# Altium PCB dv_spectrum_main.PcbDoc
Units mm, origin at the board's own origin, x right, y up, seen from the top; angles counter-clockwise.
Board outline 99.31 x 60.23 mm, 2 copper layers (Top Layer, Bottom Layer); 57 components, 70 nets, 286 pads, 112 vias.
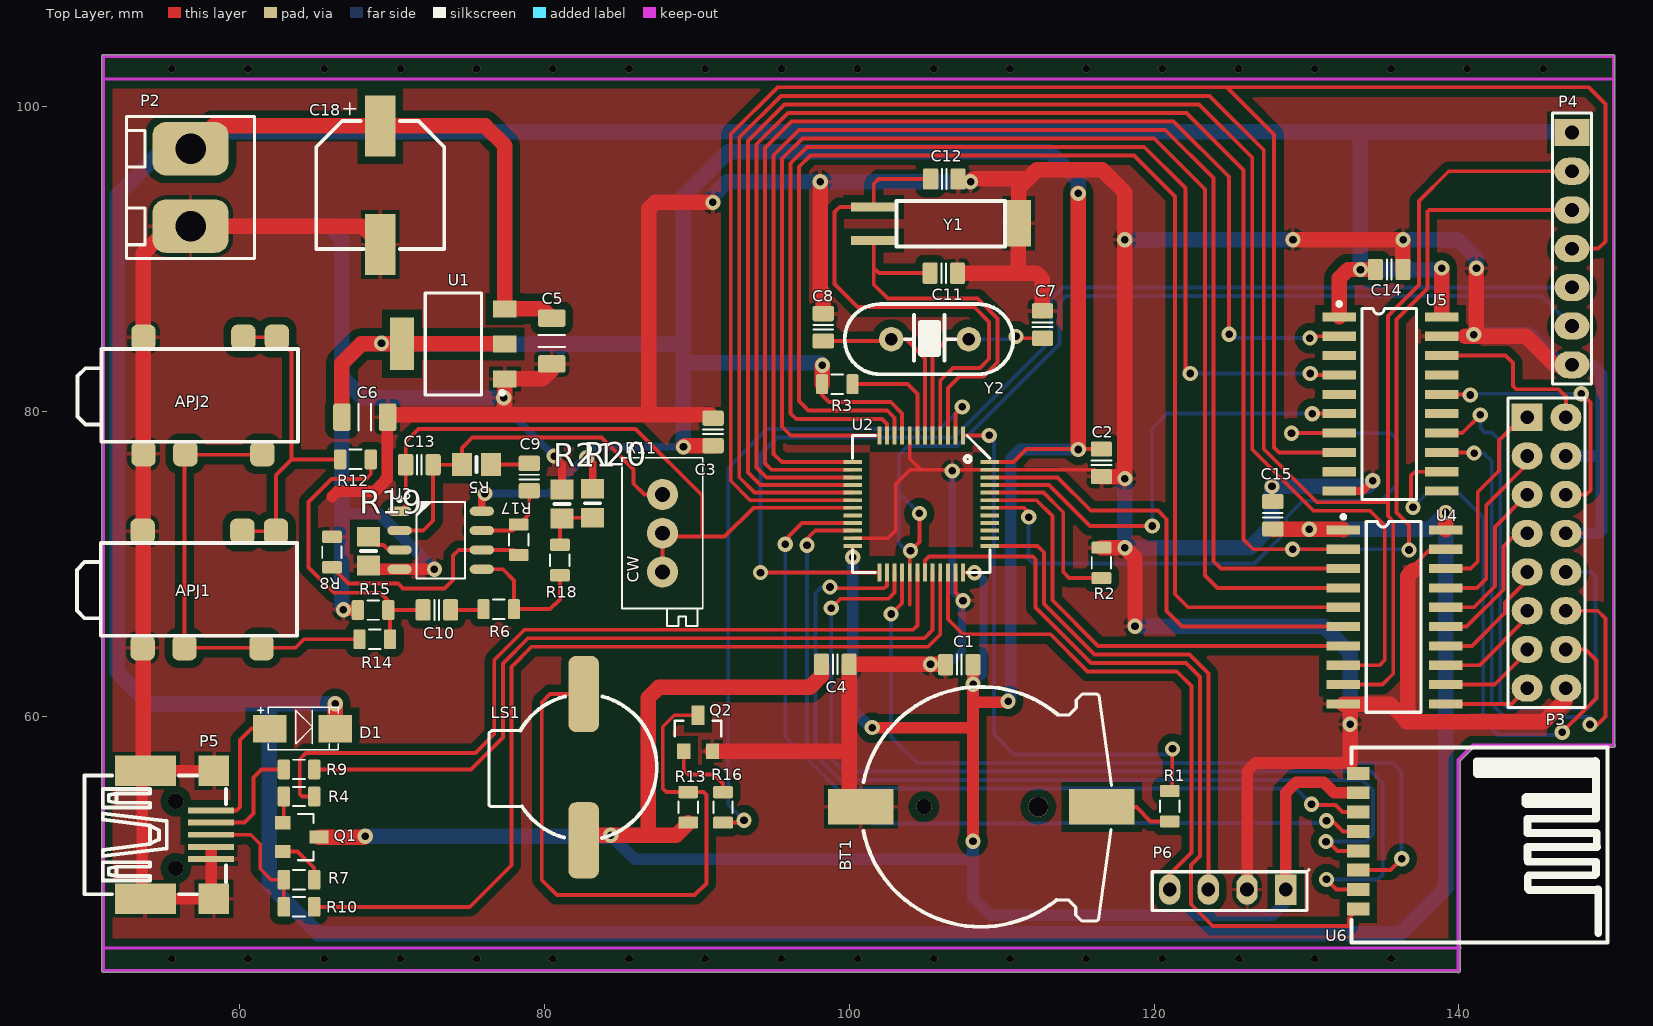
[diagram p0: Top Layer view]
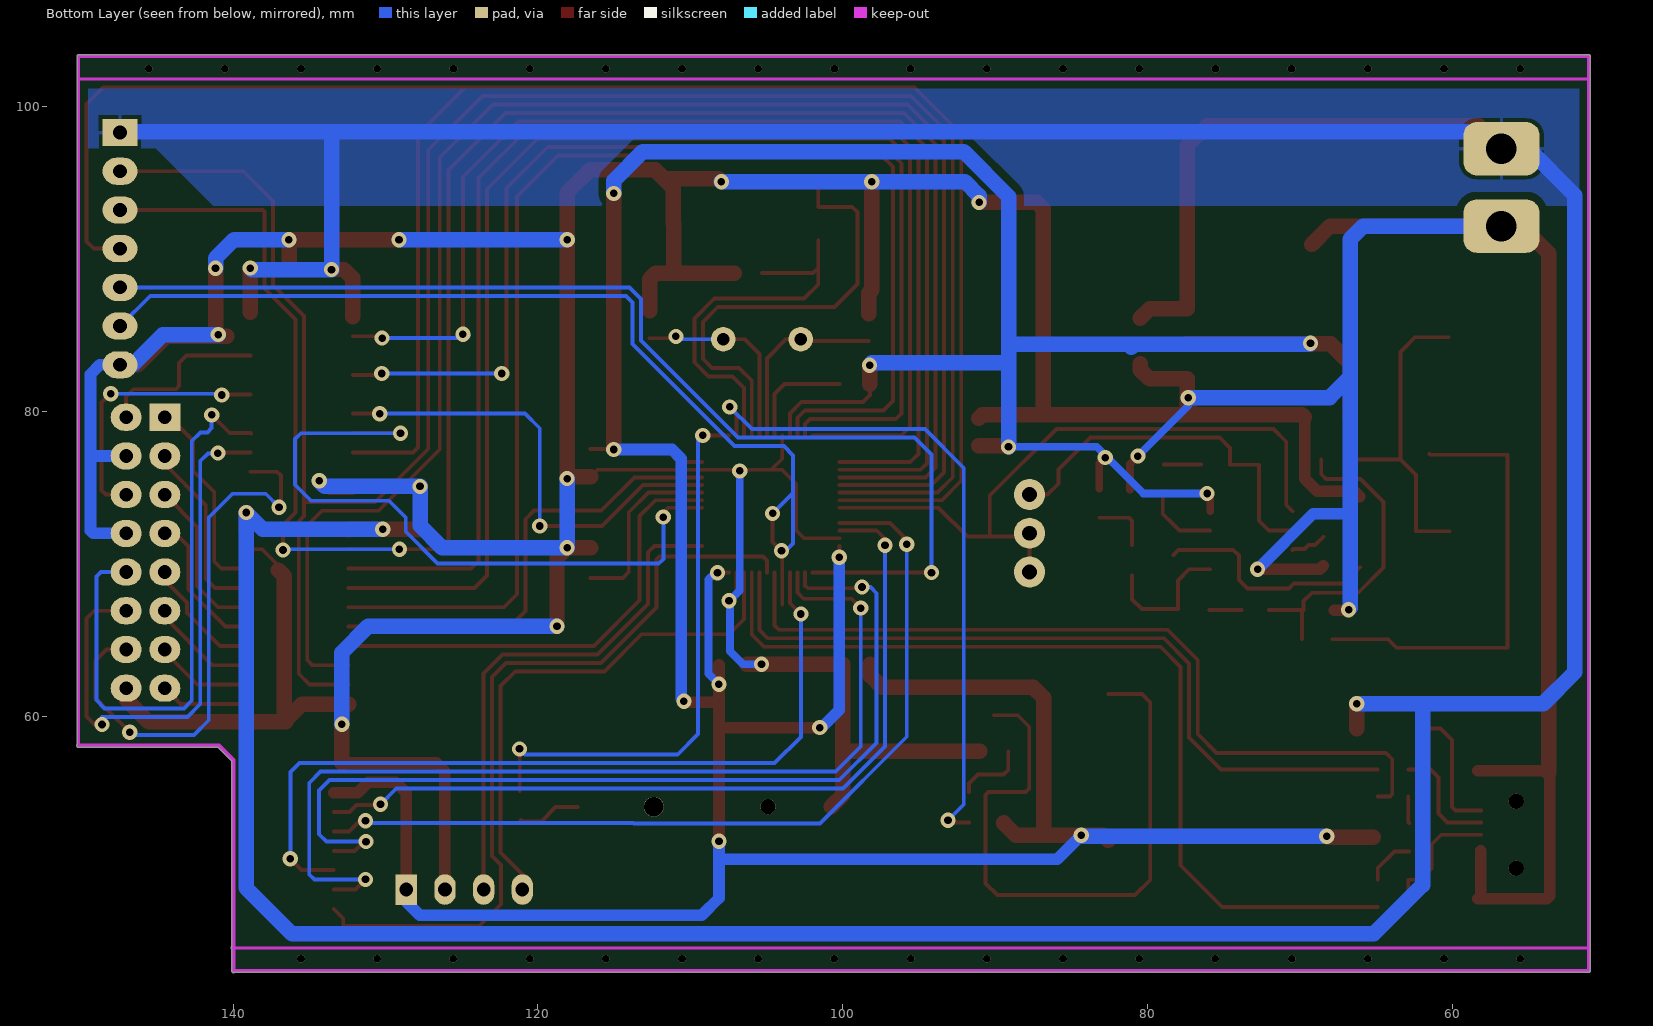
[diagram p1: Bottom Layer view, seen from below]

## Layer stack, top to bottom
Top Layer: signal copper 0.0356
Dielectric: dielectric 0.32, FR-4, Dk 4.8
Bottom Layer: signal copper 0.0356

## Board outline
50.935,43.307 ccw(c51.035,43.307) 51.035,43.207 139.879,43.207 ccw(c139.957,43.307) 140.084,43.307 140.084,44.729 ccw(c140.022,44.807) 140.122,44.807 ccw(c140.022,44.807) 140.084,44.885 140.084,57.075 140.968,57.959 150.122,57.959 ccw(c150.122,58.086) 150.249,58.086 ccw(c150.122,58.086) 150.235,58.144 150.235,103.307 ccw(c150.135,103.307) 150.135,103.407 51.035,103.407 ccw(c51.035,103.307) 50.935,103.307

## Design rules (kind name [scope] priority, off if disabled: settings)
Clearance Clearance_1 [IsRegion] p1: gap=0.508
Clearance [All] p2: gap=0.305
PolygonConnect [All] p1: connectstyle=Relief reliefconductorwidth=0.254 reliefentries=4 polygonreliefangle="90 Angle" airgapwidth=0.254
RoomDefinition dv_spectrum_main [InComponentClass('dv_spectrum_main')] p1: confinementstyle=ConfineIn formatcopy=TRUE lockcomponents=FALSE outline 48.92,44.772 150.128,44.772 150.128,101.096 48.92,101.096
RoutingVias [All] p1: holewidth=0.5 width=1 viastyle="Through Hole" minholewidth=0.5 minwidth=1 maxholewidth=0.5 maxwidth=1
SolderMaskExpansion [All] p1: expansion=0.102
Width [All] p1: maxlimit=1.016 minlimit=0.254 preferedwidth=0.254
28 further rules are at their usual default settings.

## Components (designator, comment, footprint, x,y, rotation, side; value= is the part's Value field where it differs from the comment)
APJ1 "APJ3-095S64" APJ3-095S64 53.619,64.527 r0 top
APJ2 "APJ3-095S64" APJ3-095S64 53.675,77.253 r0 top
BT1 "Battery3.3V" CR1220 100.752,54.064 r90 top
C1 "approved sub OK" CAPC2012X135N 107.206,63.394 r180 top
C2 "approved sub OK" CAPC2012X135N 116.536,76.634 r270 top
C3 "approved sub OK" CAPC2012X135N 91.053,78.662 r90 top
C4 "approved sub OK" CAPC2012X135N 99.074,63.413 r0 top
C5 "Ceramic Cap 1206 10uF 25V 10% X5R" CAPC3216X180N 80.463,84.631 r90 top
C6 "Ceramic Cap 1206 10uF 25V 10% X5R" CAPC3216X180N 68.199,79.629 r180 top
C7 "22p" CAPC2012X135N 112.664,85.706 r270 top
C8 "22p" CAPC2012X135N 98.281,85.522 r270 top
C9 "approved sub OK" CAPC2012X135N 78.988,75.701 r90 top
C10 "approved sub OK" CAPC2012X135N 72.926,66.982 r0 top
C11 "15p-50V-5%" CAPC2012X135N 106.192,89.08 r180 top
C12 "15p-50V-5%" CAPC2012X135N 106.229,95.257 r180 top
C13 "approved sub OK" CAPC2012X135N 71.783,76.507 r180 top
C14 "0.1UF 50V" CAPC2012X135N 135.418,89.32 r180 top
C15 "0.1UF 50V" CAPC2012X135N 127.783,73.192 r270 top
C18 "330u, 16v" "CAPACITOR SIZE_F(D8.3)" 69.215,98.741 r270 top
D1 "SSB44" "DO-214AC (SMA)" 62.865,59.69 r0 top
LS1 "Speaker" BUZZER-SMD 82.559,51.864 r90 top
P2 "PWR" "DOMINO SMALL" 56.762,97.247 r270 top
P3 "Led Matrix" HDR2X8 144.472,79.625 r270 top
P4 "LED Spectrum" HDR1X7 147.413,98.306 r270 top
P5 "10033526-N3222LF" "USB MINI B RECEPTACLE-M" 58.6,53.827 r90 top
P6 "Header 4" HEADER_MALE_STRAIGHT_1x4 128.632,48.532 r180 top
Q1 "C1815" SC-43-BCE 64.008,52.07 r270 top
Q2 "C1815" SC-43-BCE 90.068,58.886 r0 top
R1 "10k-5%" RESC2012X70N 121.017,54.101 r270 top
R2 "RES 3.30K OHM 1/8W" RESC2012X70N 116.536,70.069 r90 top
R3 "RES 3.30K OHM 1/8W" RESC2012X70N 99.204,81.797 r0 top
R4 "10k-5%" RESC2012X70N 63.881,54.737 r180 top
R5 "Thick Film" R0805 75.523,76.519 r0 top
R6 "Thick Film" RESC2012X70N 76.99,67.032 r0 top
R7 "1k5-5%" RESC2012X70N 63.881,49.276 r0 top
R8 "Thick Film" RESC2012X70N 66.041,70.78 r90 top
R9 "22R-5%" RESC2012X70N 63.881,56.515 r180 top
R10 "22R-5%" RESC2012X70N 63.881,47.498 r180 top
R11 "25 turns" TRIMPOT_THT_PV36X 87.732,72.014 r90 top
R12 "Thick Film" RESC2012X70N 67.588,76.861 r0 top
R13 "RES 3.30K OHM 1/8W" RESC2012X70N 89.417,54.023 r270 top
R14 "Thick Film" RESC2012X70N 68.852,65.054 r0 top
R15 "Thick Film" RESC2012X70N 68.742,66.971 r0 top
R16 "RES 3.30K OHM 1/8W" RESC2012X70N 91.703,54.023 r90 top
R17 "Thick Film" RESC2012X70N 78.296,71.594 r270 top
R18 "Thick Film" RESC2012X70N 81,70.252 r90 top
R19 "Thick Film" R0805 68.453,70.836 r270 top
R20 "Thick Film" R0805 83.147,73.977 r90 top
R21 "Thick Film" R0805 81.142,73.924 r90 top
U1 "AP1117IE33G-13" SOT223 74.015,84.436 r90 top
U2 "STM32F103C8T6" TQFP-48-P0.5 104.711,73.932 r270 top
U3 "AD8512" SOIC127P600X175-8AN 73.18,71.554 r0 top
U4 "74HC245/SO" SO20-150mil 132.415,72.236 r270 top
U5 "74HC245/SO" SO20-150mil 132.135,86.209 r270 top
U6 "RMF70" RFM70S 133.697,56.253 r270 top
Y1 "32768Hz" "cylindrical crystal" 106.358,92.325 r0 top
Y2 "8MHz" HC49/US 105.288,84.747 r0 top

## Footprints (in the part's own frame and the unit in brackets; to place one, negate y for a bottom-side part, rotate by r counter-clockwise, add the part's x,y. Pads: shape width x height; smd on the part's side, far side on the other; paste and mask are expansions set on the pad)
APJ3-095S64 [mm] "3.5 Audio Jack"
  rrect50% 1.6x1.65 smd: 1(0,-0.03) 2(6.55,7.62) 3(2.75,-0.03) 4(0,7.62) 10(8.75,7.62) 11(7.8,-0.03)
  silkscreen extent -4.32,0.76 10.14,6.86
BUZZER-SMD [mm]
  rrect50% 5x2 smd: 1(0,0) 2(9.6,0)
  silkscreen extent 0.15,-4.8 9.44,6.2, body extent -1.4,-4.52 10.9,5.63, height 4
"CAPACITOR SIZE_F(D8.3)" [mm]
  rect 4x2 smd: 1(0,0) 2(7.781,0)
  silkscreen extent -1.52,-4.2 8.08,4.2, body extent -1.02,-4.15 8.88,4.15, height 10.21
CAPC2012X135N [mm] "Chip Capacitor, Body 2.0x1.2mm, EIA 0805, IPC Medium Density"
  round 0.254 on Mech15: 0(0,0)
  rrect25% 1x1.4 smd: 1(-0.9,0) 2(0.9,0)
  Top Layer pour cut-out: -0.675,0.7 -0.475,0.9 0.475,0.9 0.675,0.7 0.675,-0.7 0.475,-0.9 -0.475,-0.9 -0.675,-0.7
  silkscreen extent -0.15,-0.65 0.15,0.65, body extent -1.1,-0.72 1.1,0.73, height 1.34
CAPC3216X180N [mm] "Chip Capacitor, Body 3.2x1.6mm, 1.8mm H, EIA 1206, IPC Medium Density"
  round 0.508 on Mech15: 0(0,0)
  rrect25% 1.15x1.8 smd: 1(-1.5,0) 2(1.5,0)
  silkscreen extent -0.4,-0.88 0.4,0.88, body extent -1.7,-0.9 1.7,0.9, height 1.8
CR1220 [mm]
  rect 2.3x4.3 smd: 1(0,-15.79) 2(0,0)
  round 1 hole 1: HOLE(0,-4.14)
  round 1.3 hole 1.3: HOLE(0,-11.64)
  silkscreen extent -7.88,-16.43 7.87,-0.16, body extent -7.3,-17.15 7.7,1.35, height 4.94
"cylindrical crystal" [mil]
  rect 118.1x23.6 smd: 1(-187.37,-43.27) 2(-187.37,43.27)
  rect 62x120 smd: 3(187.37,1.13)
  silkscreen extent -128,-59 151,59, body extent -191,-55 183,55, height 87
"DO-214AC (SMA)" [mm]
  rect 2.2x1.8 smd: 1(-0.899,-0.5) 2(3.397,-0.5)
  silkscreen extent -1.7,-1.9 3.6,0.9, body extent -1.3,-1.8 3.9,0.8, height 2.3
"DOMINO SMALL" [mm]
  rrect50% 3.5x5 hole 2: 1(5.08,0) 2(0,0)
  silkscreen extent -2.1,-4.2 7.2,4.2, body extent -2.46,-3.53 7.54,3.97, height 3.49
HC49/US [mm] "HC-49/U Through-Hole Low profile XTAL"
  round 1.6 hole 0.8: 1(-2.54,0) 2(2.54,0)
  silkscreen extent -5.59,-2.3 5.46,2.3, body extent -5.64,-2.3 5.53,2.37, height 3.63
HDR1X7 [mil] "Connector; Header; 7 Position"
  rect 70x90 hole 35.43: 1(0,0)
  oval 70x90 hole 35.43: 2(100,0) 3(200,0) 4(300,0) 5(400,0) 6(500,0) 7(600,0)
  silkscreen extent -50,-50 650,50
HDR2X8 [mil] "Connector; Header; 8x2 Position"
  rect 70x80 hole 35.43: 1(0,0)
  oval 70x80 hole 35.43: 2(0,100) 3(100,0) 4(100,100) 5(200,0) 6(200,100) 7(300,0) 8(300,100) 9(400,0) 10(400,100) 11(500,0) 12(500,100) 13(600,0) 14(600,100) 15(700,0) 16(700,100)
  silkscreen extent -50,-50 750,150
HEADER_MALE_STRAIGHT_1x4 [mm]
  rect 1.4x2 hole 0.9: 1(0,-0.1)
  oval 1.4x2 hole 0.9: 2(2.54,-0.1) 3(5.08,-0.1) 4(7.62,-0.1)
  silkscreen extent -1.52,-1.4 8.76,1.27, body extent -1.26,-1.35 8.8,1.15, height 8.2
R0805 [mm] "Chip Resistor; Body 2.0 x 1.2 mm (LxW typ)"
  rect 1.3x1.5 smd: 1(0.95,0) 2(-0.95,0)
  silkscreen extent 0,-0.5 0,0.5, body extent -1,-0.65 1,0.6, height 0.78
RESC2012X70N [mm] "Chip Resistor, Body 2.0x1.2mm, EIA 0805, IPC Medium Density"
  round 0.254 on Mech15: 0(0,0)
  rrect25% 0.8x1.3 smd: 1(-1,0) 2(1,0)
  Top Layer pour cut-out: -0.725,0.65 -0.525,0.85 0.525,0.85 0.725,0.65 0.725,-0.65 0.525,-0.85 -0.525,-0.85 -0.725,-0.65
  silkscreen extent -0.38,-0.64 0.38,0.64, body extent -1.1,-0.67 1.1,0.68, height 0.69
RFM70S [mm]
  rect 0.85x1.5 smd: 1(0,-0.305) 2(1.27,-0.305) 3(2.54,-0.305) 4(3.81,-0.305) 5(5.08,-0.305) 6(6.35,-0.305) 7(7.62,-0.305) 8(8.89,-0.305)
  Top Layer pour cut-out: -0.559,-0.787 -0.559,0.762 9.474,0.762 9.474,-0.813
  silkscreen extent -1.7,-0.76 11.1,16.05
SC-43-BCE [mil]
  rect 34x40 smd: B(-37.02,-46.5) E(37.02,-46.5)
  rect 34x50 smd: C(0.02,46.5)
  silkscreen extent -60,-8 60,33, body extent -57,-52 57,58, height 41
SO20-150mil [mm] "Small Outline; 16 Leads; Body Width 3.9 mm; Pitch 1.27 mm"
  rect 0.6x2.2 smd: 1(0,0) 2(1.27,0) 3(2.54,0) 4(3.81,0) 5(5.08,0) 6(6.35,0) 7(7.62,0) 8(8.89,0) 9(10.16,0) 10(11.43,0) 11(11.43,6.724) 12(10.16,6.724) 13(8.89,6.724) 14(7.62,6.724) 15(6.35,6.724) 16(5.08,6.724) 17(3.81,6.724) 18(2.54,6.724) 19(1.27,6.724) 20(0,6.724)
  silkscreen extent -0.97,-0.12 11.97,5.08, body extent -0.75,-0.5 12.15,7.3, height 2
SOIC127P600X175-8AN [mm] "SOIC, 8-Leads, Body 4.9x3.9mm, Pitch 1.27mm, IPC Medium Density"
  round 1 on Mech15: 0(0,0)
  oval 1.6x0.6 smd: 1(-2.7,1.905) 2(-2.7,0.635) 3(-2.7,-0.635) 4(-2.7,-1.905) 5(2.7,-1.905) 6(2.7,-0.635) 7(2.7,0.635) 8(2.7,1.905)
  silkscreen extent -2.82,-2.5 1.6,2.82, body extent -3,-2.45 3,2.45, height 1.75
SOT223 [mm] "SOT-223/SC-73; 4 Leads; Body 6.7 x 7.3 mm, inc. leads (LxW max)"
  rect 1.1x1.55 smd: 1(-2.3,-3.375) 2(0,-3.375) 3(2.3,-3.375)
  rect 3.45x1.55 smd: 4(0,3.375)
  silkscreen extent -3.35,-3.33 3.35,1.85, body extent -3.25,-3.43 3.25,3.57, height 1.65
TQFP-48-P0.5 [mm] "Thin QFP, 48-Leads, Body 7x7mm, Pitch 0.5mm, IPC Medium Density"
  rect 1.2x0.254 smd mask+0.152: 1(-4.5,2.75) 2(-4.5,2.25) 3(-4.5,1.75) 4(-4.5,1.25) 5(-4.5,0.75) 6(-4.5,0.25) 7(-4.5,-0.25) 8(-4.5,-0.75) 9(-4.5,-1.25) 10(-4.5,-1.75) 11(-4.5,-2.25) 12(-4.5,-2.75) 25(4.5,-2.75) 26(4.5,-2.25) 27(4.5,-1.75) 28(4.5,-1.25) 29(4.5,-0.75) 30(4.5,-0.25) 31(4.5,0.25) 32(4.5,0.75) 33(4.5,1.25) 34(4.5,1.75) 35(4.5,2.25) 36(4.5,2.75)
  rect 0.254x1.2 smd mask+0.152: 13(-2.75,-4.5) 14(-2.25,-4.5) 15(-1.75,-4.5) 16(-1.25,-4.5) 17(-0.75,-4.5) 18(-0.25,-4.5) 19(0.25,-4.5) 20(0.75,-4.5) 21(1.25,-4.5) 22(1.75,-4.5) 23(2.25,-4.5) 24(2.75,-4.5) 37(2.75,4.5) 38(2.25,4.5) 39(1.75,4.5) 40(1.25,4.5) 41(0.75,4.5) 42(0.25,4.5) 43(-0.25,4.5) 44(-0.75,4.5) 45(-1.25,4.5) 46(-1.75,4.5) 47(-2.25,4.5) 48(-2.75,4.5)
  silkscreen extent -4.5,-4.5 4.5,4.5, body extent -4.5,-4.5 4.5,4.5, height 1.5
TRIMPOT_THT_PV36X [mil] "TRIMMER, MURATA, PV36X"
  round 80 hole 38: CCW(100,0) CW(-100,0) W(0,0)
  silkscreen extent -240,-104 195,104, body extent -240,-98 189,98, height 394
"USB MINI B RECEPTACLE-M" [mm]
  rect 0.381x3 smd: 1(0,0.5) 2(-0.8,0.5) 3(-1.6,0.5) 4(-2.4,0.5) 5(-3.2,0.5)
  rect 2x2 smd: 6(2.601,0.3) 7(-5.801,0.3)
  rect 2x4 smd: 8(2.601,4.801) 9(-5.801,4.801)
  round 1 / inner round 1.524 / far side round 1 hole 1: 10(0.6,2.8) 11(-3.8,2.8)
  silkscreen extent -5.5,-0.5 2.3,8.8, body extent -6.9,-0.4 3.8,8.8, height 3.95

## Part data
BT1: "Multicell Battery"
C1 C2 C3 C4: library part CAPC_100n_0805_X7R_100V_10%, "Capacitor SMD Cer 100nF 10% 100V X7R 0805"
C5 C6: library part GRM31CR61E106KA12, "Cap 1206 10uF 25V 10% X5R"
C7 C8: library part "Cap Semi", "Capacitor (Semiconductor SIM Model)"
C9: library part CAPC_100n_0805_X7R_50V_10%, "Capacitor SMD Cer 100nF 10% 50V X7R 0805"
C10: library part CAPC_1u_0805_X7R_16V_10%, "Capacitor SMD Cer 1uF 10% 16V X7R 0805"
C11 C12: library part Cap, "CAP CER 15PF 50V 5% NPO 0603"
C13: library part CAPC_1n8_50V_0805, "Capacitor SMD Cer 1.8nF 10% 50V X7R 0805"
C14 C15: library part CC0805ZRY5V9BB104, "CAP CER 0.1UF 50V Y5V 0805"
C18: library part "Cap Pol3", "Polarized Capacitor (Surface Mount)"
D1: "Schottky Diode 40V 4A SMB"
LS1: "Loudspeaker"
P2: library part "Header 2", "Header, 2-Pin"
P3: library part "Header 8X2", "Header, 8-Pin, Dual row"
P4: library part "Header 7", "Header, 7-Pin"
P5: library part "Header 9", "CONN RCPT USB MINI B R/A SMD"
P6: "Header, 4-Pin"
Q1 Q2: library part "NPN Transistor", "TRANSISTOR NPN 50V 150MA"
R1 R4: library part Res1, "RES 10K OHM 1/10W 5% 0603 SMD"
R2 R3 R13 R16: library part RC0805FR-073K3L, "RES 3.30K OHM 1/8W 1% 0805 SMD"
R5 R12 R14: library part RES_4K7_0805_5%, "Resistor SMD chip 4.7k Ohm 0.125W 5% 0805"
R6 R8 R15 R17 R18 R19 R20 R21: library part RES_10K_0805_5%, "Resistor SMD chip 10k Ohm 0.125W 5% 0805"
R7: library part Res1, "RES 1.5K OHM 1/10W 5% 0603 SMD"
R9 R10: library part Res1, "RES 22 OHM 1/10W 5% 0603 SMD"
R11: library part RES_TRIMMER_10K_25T_THT, "Trimmer THD 10K 500mW 25-turn"
U1: "1A Low Dropout Positive Regulator 3.3V"
U2: "48pins, 64 KBytes Flash, 20 KBytes SRAM, 1x I2C, 1x SPI (18 Mbit/s)"
U3: library part IC_Op-Amp_AD8512, "IC SMD Low Cost Op Amp SOIC-8"
U4 U5: library part 74HC245/SO_1
Y1: library part XTAL, "CRYSTAL 32.000 KHZ 12.5PF CYL"
Y2: library part XTAL, "Crystal Oscillator"

## Via types
v1: diameter 1, hole 0.5, Top Layer to Bottom Layer, 76 vias
v2: diameter 0.508, hole 0.508, Top Layer to Bottom Layer, tented both sides, 19 vias
v3: diameter 0.5, hole 0.5, Top Layer to Bottom Layer, tented both sides, 17 vias

## Nets (pads, with @x,y where several pads share a name; then routed paths per layer and width w, separated by ;. In a path a pad name is that pad's centre, name@x,y a point inside that pad or via, vN(x,y) a via of type N, cw(c..) or ccw(c..) an arc to the next point about the centre after c; other vN are vias at no path point)
3V3: C1.1 C2.1 C3.1 C4.1 C6.2 LS1.1 P6.1 Q1.C R3.1 R13.2 R20.1 U1.2 U1.4 U2.9 U2.24 U2.36 U2.48 U3.8 U6.2 | length 314.7
  Top Layer w0.254: R3.1 98.204,81.074 98.649,80.628 102.712,80.628 103.461,79.878 U2.9 ; v1(100.211,70.435) U2.24 ; U2.36 v1@108.362,69.432 ; U2.48 110.759,76.682 111.611,77.534 115.008,77.534 C2.1
  Top Layer w0.5: U3.8 75.88,74.424 v1(76.079,74.623) ; v1(82.763,76.979) 83.147,76.594 R20.1
  Top Layer w0.762: v1(101.498,59.259) 108.014,59.259 ; v1(108.106,51.806) 108.106,60.914 ; C1.1 108.106,60.914 ; v1(110.413,60.987) 110.339,60.914 108.106,60.914 ; P6.1 128.632,54.981 129.321,55.669 131.13,55.669 131.816,54.983 U6.2
  Top Layer w1.016: Q1.C v1@68.134,52.07 ; C6.2 66.699,83.168 67.967,84.436 U1.2 ; LS1.1 82.896,52.201 v1(84.331,52.201) 86.812,52.201 ; v1(89.11,77.677) 89.195,77.762 C3.1 ; R13.2 89.417,52.968 88.65,52.201 86.812,52.201 ; C4.1 98.174,62.676 97.404,61.906 87.492,61.906 86.812,61.226 86.812,52.201 ; R3.1 98.204,83.012 v1(98.226,83.035) ; v1(115.008,77.511) 115.008,77.534 v1(115.008,94.311)
  Bottom Layer w0.5: v1(76.079,74.623) 80.273,74.623 83.327,77.677 v1(89.11,77.677)
  Bottom Layer w0.508: v1(108.115,62.108) 108.795,62.788 108.795,68.983 108.354,69.424 v1(108.207,69.424)
  Bottom Layer w0.762: v1@84.257,52.128 84.404,52.128 85.911,50.62 108.106,50.62 ; v1(100.211,70.435) 100.211,60.418 v1@101.333,59.296 ; v1(108.106,51.806) 108.106,50.62 ; v1@110.575,61.149 110.575,76.901 111.185,77.511 v1(115.008,77.511) ; P6.1 128.632,47.831 127.746,46.945 109.241,46.945 108.106,48.079 108.106,50.62
  Bottom Layer w1.016: v1(68.229,52.128) v1@84.257,52.128 ; v1(69.295,84.478) 69.35,84.422 80.857,84.422 ; 81.059,84.22 80.857,84.422 ; v1(89.11,77.677) 89.11,83.191 ; v1@98.07,83.191 89.11,83.191 ; v1(115.008,94.311) 115.008,95.157 113.115,97.05 92.051,97.05 89.11,94.109 89.11,84.735 ; 80.857,84.422 88.797,84.422 89.11,84.735 ; 89.11,83.191 89.11,84.735
5V: C5.2 C14.2 C15.2 C18.1 D1.2 P2.2 P4.1 U1.3 U4.1 U4.20 U5.1 U5.20 | length 336.5
  Top Layer w1.016: P2.2 58.256,98.741 C18.1 76.097,98.741 77.39,97.447 U1.3 79.858,86.736 C5.2 ; D1.2 v1(66.262,60.822) ; C15.2@127.838,72.236 127.884,72.282 132.369,72.282 U4.1 ; U5.1 132.135,88.738 132.717,89.32 C14.2 ; 138.859,86.518 138.876,86.535 v1(138.876,89.413) ; U4.20 v1(139.139,73.372)
  Bottom Layer w1.016: v1(66.262,60.822) 61.943,60.822 ; v1(130.171,72.271) 138.037,72.271 v1(139.139,73.372) 139.139,48.742 136.116,45.72 65.152,45.72 61.943,48.929 61.943,60.822 ; 133.536,98.316 v1(133.536,89.312) v1@138.774,89.312 ; P4.1 147.348,98.371 56.132,98.371 56.762,97.741 P2.2 55.008,97.247 51.948,94.186 51.948,62.895 54.021,60.822 61.943,60.822
A: U2.46 U4.6 | length 30.8
  Top Layer w0.254: U2.46 113.653,75.682 115.836,73.499 120.24,73.499 120.806,72.934 120.806,66.898 121.817,65.886 U4.6
AUIN: C13.2 R11.CW R11.W U2.19 U3.1 | length 44.6
  Top Layer w0.254: U3.1 70.883,73.862 C13.2 70.883,78.015 71.721,78.853 85.971,78.853 90.344,74.479 90.344,71.794 ; R11.CW R11.W ; R11.W@87.952,71.794 90.344,71.794 ; U2.19 93.698,73.682 91.811,71.794 90.344,71.794
B: U2.45 U5.6 | length 30.9
  Top Layer w0.254: U2.45 113.084,75.182 115.781,72.485 v1(119.874,72.485) ; v1@130.367,79.859 U5.6
  Bottom Layer w0.254: v1(119.874,72.485) 119.874,78.902 120.833,79.86 v1(130.366,79.86)
B1: U2.13 U4.3 | length 89.7
  Top Layer w0.254: 95.566,76.682 U2.13 ; 95.566,76.74 95.507,76.74 95.023,77.224 95.023,96.819 96.686,98.481 120.725,98.481 123.893,95.313 123.893,70.177 124.374,69.696 U4.3
B2: U2.10 U4.5 | length 86.8
  Top Layer w0.254: U2.10 102.961,79.588 102.48,80.069 97.321,80.069 96.7,80.69 96.7,96.061 97.443,96.805 118.666,96.805 121.364,94.106 121.364,68.012 122.22,67.156 U4.5
BUZZER: R16.1 U2.2 | length 44.1
  Top Layer w0.254: R16.1 92.926,53.023 v1(93.082,53.179) ; U2.2 106.961,79.855 v1(107.409,80.303)
  Bottom Layer w0.254: v1(93.082,53.179) 92.049,54.211 92.049,76.302 94.594,78.846 105.952,78.846 v1(107.409,80.303)
C: U2.43 U4.7 | length 30.4
  Top Layer w0.254: U2.43 112.277,74.182 113.326,73.132 113.326,67.614 116.323,64.616 U4.7
CK: P4.5 U2.25 | length 74.9
  Top Layer w0.254: v1(94.162,69.432) U2.25
  Bottom Layer w0.254: v1(94.162,69.432) 94.162,77.178 95.271,78.288 106.851,78.288 113.218,84.654 113.218,87.374 113.989,88.146 P4.5
D: U2.42 U5.7 | length 45.9
  Top Layer w0.254: U2.42 111.467,73.682 v1@111.963,73.186 ; v1(129.01,78.576) 129.023,78.589 U5.7
  Bottom Layer w0.254: v1(111.761,73.075) 111.761,70.33 112.06,70.03 126.575,70.03 128.667,72.123 128.667,73.047 129.765,74.145 134.875,74.145 135.925,75.195 135.925,78.191 135.541,78.576 v1(129.01,78.576)
D+: P5.3 R7.1 R10.2 | length 8.7
  Top Layer w0.254: P5.3 60.713,52.227 61.336,51.604 61.336,49.995 62.056,49.276 R7.1 R10.2
D-: P5.2 R9.2 | length 7.6
  Top Layer w0.254: P5.2 60.306,53.027 60.895,53.616 60.895,55.987 61.423,56.515 R9.2
G1: U2.14 U5.2 | length 77.4
  Top Layer w0.254: U2.14 94.88,76.182 94.464,76.597 94.464,97.304 96.2,99.04 121.278,99.04 124.915,95.403 v1(124.915,85.066) ; v1(130.218,84.821) 130.337,84.939 U5.2
  Bottom Layer w0.254: v1@124.511,84.974 124.664,84.821 v1(130.218,84.821)
G2: U2.11 U5.4 | length 73.3
  Top Layer w0.254: U2.11 102.461,79.184 102.135,79.51 96.51,79.51 96.141,79.879 96.141,96.292 97.212,97.364 119.345,97.364 122.048,94.661 v1@122.048,82.676 ; v1(130.237,82.497) 130.335,82.399 U5.4
  Bottom Layer w0.254: v1(122.36,82.497) v1(130.237,82.497) v1@130.237,82.756
GND: APJ1.1 APJ1.4 APJ2.1 APJ2.4 BT1.2 C1.2 C2.2 C3.2 C4.2 C5.1 C6.1 C7.1 C8.1 C11.1 C12.1 C14.1 C15.1 C18.2 P2.1 P3.4 P3.8 P3.16 P4.7 P5.4 P5.5 P5.6 P5.7 P5.8 P5.9 P6.2 Q2.E R2.2 R8.2 R15.1 R19.1 R21.1 U1.1 U2.8 U2.23 U2.35 U2.47 U3.4 U4.10 U4.19 U5.10 U5.19 U6.1 Y1.3 | length 491.1
  Top Layer w0.254: U2.23 102.524,71.682 103.042,72.2 103.042,75.251 103.973,76.182 104.684,76.182 ; U2.8 103.961,76.905 104.684,76.182 ; U2.35 106.961,68.133 v1@107.362,67.733 ; C2.2 116.088,76.182 U2.47 104.684,76.182 ; 137.028,69.6 137.028,69.89 138.105,70.966 U4.19
  Top Layer w0.5: v1(80.618,77.075) 81.142,76.55 R21.1
  Top Layer w0.508: U5.10 133.671,74.779 v1(134.344,75.452)
  Top Layer w0.762: 58.129,51.19 58.129,48.198 P5.7 P5.9 53.598,48.228 53.598,56.226 53.675,56.304 P5.8 P5.6 ; 66.064,74.424 66.41,74.769 68.842,74.769 69.673,75.6 69.673,79.603 C6.1 ; v1@67.008,66.971 R15.1 ; R19.1 68.69,69.649 U3.4 72.758,69.649 v1(72.765,69.643) ; 110.562,89.08 111.08,89.598 ; P6.2@126.092,49.15 126.092,56.393 126.639,56.939 132.85,56.939
  Top Layer w1.016: P5.8@53.675,56.304 APJ2.1 APJ2.4 53.675,90.4 55.442,92.167 P2.1 68.008,92.167 C18.2 ; C6.1 69.863,79.793 76.944,79.793 ; C5.1 80.463,82.743 79.857,82.136 U1.1 77.39,80.239 76.944,79.793 ; Q2.E 99.874,57.705 99.974,57.605 ; v1(91.04,93.723) 87.253,93.723 86.83,93.3 86.83,79.793 ; C3.2 90.822,79.793 86.83,79.793 ; v1(98.079,95.083) 98.079,87.971 98.281,87.769 C8.1 ; BT1.2 99.974,54.842 99.974,57.605 ; C1.2@106.287,63.413 C4.2 99.974,57.605 ; C11.1 110.562,89.08 112.262,89.08 112.664,88.678 C7.1 ; v1@108.134,95.267 111.7,95.267 ; 111.08,89.598 Y1.3@111.08,92.354 ; Y1.3 111.117,94.685 111.7,95.267 ; R2.2 v1@118.068,71.069 ; C2.2 v1@117.944,75.734 ; v1(118.078,71.06) 118.739,70.398 v1(118.739,65.913) ; v1(118.078,75.6) 118.078,94.366 116.579,95.865 112.298,95.865 111.7,95.267 ; P6.2 P6.2@126.092,49.15 ; v1(129.106,91.278) v1(136.33,91.278) ; U4.10 U4.10@132.659,60.806 ; 132.85,56.939 132.85,60.615 U4.10@132.659,60.806 ; C14.1 v1@136.318,91.267 ; 136.477,59.807 135.478,60.806 U4.10@132.659,60.806 ; 136.554,59.64 145.533,59.64 147.012,61.119 P3.16 ; 136.624,59.789 136.624,69.196 137.028,69.6 ; 140.395,84.939 144.393,84.939 146.266,83.066 P4.7 ; v1@141.146,85.121 v1(141.146,89.404) ; 76.944,79.793 86.83,79.793
  Bottom Layer w0.5: v1(77.309,80.912) 77.309,80.383 v1(80.618,77.075)
  Bottom Layer w0.508: v1(105.321,63.413) 106.534,63.413 107.389,64.268 107.389,67.622 106.755,68.257 v1(106.755,76.105)
  Bottom Layer w0.762: 66.685,73.282 69.126,73.282 v1(72.765,69.643) ; P3.8 149.167,72.005 149.349,72.187 149.349,77.07 ; P3.4 149.334,77.085 149.349,77.07 ; P4.7 148.733,83.066 149.349,82.45 149.349,77.07
  Bottom Layer w1.016: P2.1 65.833,92.167 66.685,91.315 66.685,82.272 ; v1@66.685,67.108 66.685,73.282 66.685,82.272 ; v1(77.309,80.912) 68.045,80.912 66.685,82.272 ; v1(91.04,93.723) 91.04,94.146 91.977,95.083 v1(98.079,95.083) v1(107.95,95.083) ; v1(118.059,91.278) v1(129.106,91.278) ; v1(118.078,75.6) v1(118.078,71.06) 126.275,71.06 127.727,72.512 v1(127.727,75.085) 133.977,75.085 v1(134.344,75.452) ; v1(118.739,65.913) 131.128,65.913 132.856,64.185 v1(132.856,59.48) ; v1(136.33,91.278) 139.932,91.278 141.146,90.065 v1(141.146,89.404) ; v1(140.962,85.047) 144.601,85.047 146.583,83.066 P4.7
  other v1: 66.795,66.998 107.454,67.586
LE: P4.6 U2.29 | length 65.8
  Top Layer w0.254: 103.961,67.341 U2.29 103.961,70.821 v1(104.007,70.867) 104.59,71.45 v1(104.59,73.313)
  Bottom Layer w0.254: v1(104.007,70.867) 103.713,70.867 103.247,71.332 103.247,74.589 ; v1(104.59,73.313) 103.314,74.589 103.247,74.589 ; P4.6 145.432,87.587 114.221,87.587 113.777,87.143 113.777,84.423 107.083,77.729 103.851,77.729 103.247,77.125 103.247,74.589
LEFT: APJ1.2 APJ1.10 APJ2.2 APJ2.10 R12.1 | length 21.1
  Top Layer w0.254: APJ1.2 APJ1.10 62.369,75.842 63.388,76.861 ; APJ2.2 APJ2.10 63.388,83.91 63.388,76.861 ; R12.1 63.388,76.861
MCLK: U2.16 U4.8 | length 106.1
  Top Layer w0.254: U2.16 94.165,75.182 93.34,76.007 93.34,97.76 95.737,100.158 122.936,100.158 126.43,96.664 126.43,77.508 130.449,73.488 134.168,73.488 135.126,72.53 135.126,63.686 134.786,63.346 U4.8
MLE: P4.4 U2.18 U5.8 | length 131.1
  Top Layer w0.254: U2.18 93.487,74.182 92.215,75.454 92.215,98.216 95.274,101.275 148.519,101.275 149.603,100.191 149.603,91.152 149.137,90.686 P4.4 ; 124.773,101.275 127.872,98.176 127.872,77.647 128.199,77.319 U5.8
MOE: P4.2 U2.17 U4.9 | length 142.8
  Top Layer w0.254: U2.17 93.777,74.682 92.774,75.685 92.774,97.984 95.506,100.716 123.62,100.716 127.185,97.151 127.185,77.543 130.681,74.047 135.3,74.047 ; U4.9 134.97,62.076 135.685,62.791 135.685,72.789 135.337,73.137 135.337,86.261 137.377,88.301 137.377,93.815 139.328,95.766 P4.2
NetBT1_1: BT1.1 R1.2 | length 4.1
  Top Layer w0.254: BT1.1@117.404,54.043 118.826,54.043 119.768,53.101 R1.2 ; R1.2@121.1,53.184 R1.2@121.183,53.101
NetC9_1: C9.1 R17.1 U3.7 | length 5.1
  Top Layer w0.254: U3.7 77.892,72.189 R17.1 78.988,73.286 C9.1
NetC9_2: C9.2 R5.1 | length 2.4
  Top Layer w0.254: R5.1 C9.2@78.906,76.519
NetC10_1: C10.1 R12.2 R14.2 R15.2 | length 21.1
  Top Layer w0.254: R12.2 68.588,75.885 68.284,75.582 66.024,75.582 64.499,74.057 64.499,69.772 66.16,68.111 69.202,68.111 69.742,67.571 R15.2 ; R14.2 69.852,66.861 R15.2 ; C10.1@72.015,66.971 R15.2
NetC10_2: C10.2 R6.1 | length 2.1
  Top Layer w0.254: C10.2 R6.1@75.94,66.982
NetC13_1: C13.1 R5.2 R11.CCW U3.2 | length 24.7
  Top Layer w0.254: U3.2 72.036,72.189 72.683,72.836 C13.1 R5.2@74.561,76.507 ; R5.2 74.573,77.619 75.249,78.294 83.742,78.294 85.834,76.202 85.834,75.261 86.54,74.554 R11.CCW
NetD1_1: D1.1 P5.1 | length 8.7
  Top Layer w0.254: P5.1 59.783,53.827 60.013,54.058 60.013,58.451 60.753,59.19 D1.1
NetLS1_2: LS1.2 Q2.C R13.1 | length 41.7
  Top Layer w0.254: LS1.2 80.359,61.464 79.809,60.914 79.809,49.26 80.801,48.268 89.845,48.268 90.617,49.04 90.617,54.829 90.423,55.023 R13.1 87.997,55.023 87.752,55.268 87.752,59.317 88.502,60.067 Q2.C
NetP3_1: P3.1 U4.18 | length 13.3
  Top Layer w0.254: U4.18 140.774,69.696 141.233,70.155 141.233,74.721 142.623,76.11 142.623,78.107 144.14,79.625 P3.1
NetP3_2: P3.2 U5.18 | length 11.5
  Top Layer w0.254: U5.18 143.057,83.669 143.535,83.191 143.535,81.666 143.737,81.463 146.531,81.463 147.012,80.982 P3.2
NetP3_3: P3.3 U4.17 | length 12.1
  Top Layer w0.254: U4.17 141.177,68.426 141.792,69.041 141.792,73.86 144.472,76.54 P3.3
NetP3_5: P3.5 U4.16 | length 10.7
  Top Layer w0.254: U4.16 140.973,67.156 142.355,68.538 142.355,70.916 142.351,70.92 142.351,72.424 P3.5
NetP3_6: P3.6 U5.16 | length 17.7
  Top Layer w0.254: U5.16 140.69,81.129 v1(140.732,81.086) ; P3.6 148.344,74.545 148.626,74.828 148.626,80.599 v1@148.084,81.142
  Bottom Layer w0.254: v1@140.52,81.169 v1(148.02,81.169)
NetP3_7: P3.7 U4.15 | length 9.5
  Top Layer w0.254: U4.15 140.494,65.886 142.914,68.307 142.914,71.147 142.91,71.152 143.763,72.005 P3.7
NetP3_9: P3.9 U4.14 | length 8.1
  Top Layer w0.254: U4.14 140.85,64.616 143.002,66.768 143.002,66.791 ; 143.025,66.791 143.025,67.472 144.472,68.92 P3.9
NetP3_10: P3.10 U5.14 | length 39.5
  Top Layer w0.254: U5.14@138.829,78.559 U5.14 140.211,78.589 v1(141.4,79.778)
  Bottom Layer w0.254: v1(141.4,79.778) 141.4,78.918 141.685,78.633 142.138,78.633 142.708,78.063 142.708,61.043 143.226,60.524 148.421,60.524 148.957,61.061 148.957,69.167 148.659,69.465 P3.10
NetP3_11: P3.11 U4.13 | length 7.1
  Top Layer w0.254: U4.13 141.336,63.346 144.472,66.483 P3.11
NetP3_12: P3.12 U5.13 | length 36.7
  Top Layer w0.254: U5.13 140.945,77.319 v1(140.992,77.272) ; P3.12 149.106,66.925 149.603,66.428 149.603,59.979 149.086,59.461 v1(148.599,59.461)
  Bottom Layer w0.254: v1@140.992,77.254 141.652,77.254 142.149,76.758 142.149,60.811 142.994,59.966 148.599,59.966
NetP3_13: P3.13 U4.12 | length 6.4
  Top Layer w0.254: U4.12 142.345,62.076 144.472,64.204 P3.13
NetP3_14: P3.14 U5.12 | length 36.8
  Top Layer w0.254: v1(136.978,73.726) 136.855,73.848 136.855,75.795 137.109,76.049 U5.12 ; v1(146.77,58.951) 148.213,60.393 148.216,60.393 149.031,61.208 149.031,63.652 148.298,64.385 P3.14
  Bottom Layer w0.254: v1(136.978,73.726) 137.854,74.602 140.041,74.602 141.59,73.053 141.59,59.743 142.549,58.784 146.604,58.784 v1(146.77,58.951)
NetP3_15: P3.15 U4.11 | length 5.8
  Top Layer w0.254: U4.11 143.434,60.806 P3.15
NetQ1_B: Q1.B R4.2 | length 1.7
  Top Layer w0.254: Q1.B 62.881,53.064 R4.2
NetQ1_E: Q1.E R7.2 | length 3.3
  Top Layer w0.254: Q1.E 63.794,51.13 64.881,50.043 R7.2
NetQ2_B: Q2.B R16.2 | length 4.7
  Top Layer w0.254: Q2.B 89.128,56.484 89.441,56.171 91.113,56.171 91.703,55.582 R16.2
NetR1_1: R1.1 U2.1 | length 36.6
  Top Layer w0.254: U2.1 v1(109.17,78.432) ; R1.1@121.183,55.101 121.183,57.844 v1(121.201,57.862)
  Bottom Layer w0.254: v1(109.17,78.432) 109.481,78.12 109.481,58.831 110.817,57.495 120.834,57.495 v1(121.201,57.862)
NetR2_1: R2.1 U2.44 | length 12
  Top Layer w0.254: U2.44 112.735,74.682 114.029,73.388 114.029,69.461 114.42,69.069 R2.1
NetR3_2: R3.2 U2.7 | length 7.2
  Top Layer w0.254: R3.2 103.813,81.797 104.461,81.148 U2.7
NetR6_2: R6.2 R18.1 U3.5 | length 9.2
  Top Layer w0.254: U3.5 77.26,69.649 77.99,68.919 R6.2 80.363,67.032 81,67.669 R18.1
NetR8_1: R8.1 R17.2 U3.6 | length 14.9
  Top Layer w0.254: R8.1 67.117,68.704 70.39,68.704 70.696,68.398 73.435,68.398 73.991,68.953 73.991,70.543 74.367,70.919 U3.6 77.97,70.919 R17.2
NetR18_2: R18.2 R20.2 R21.2 | length 3.8
  Top Layer w0.254: R18.2 81,72.831 R21.2 81.196,73.027 R20.2
NetR19_2: R19.2 U3.3 | length 2.4
  Top Layer w0.254: R19.2 68.987,71.252 69.413,71.252 69.697,70.968 70.431,70.968 U3.3
OSC1: C8.2 U2.6 Y2.1 | length 12.3
  Top Layer w0.254: C8.2 102.623,84.622 Y2.1 103.703,84.747 104.961,83.488 U2.6
OSC2: C7.2 U2.5 Y2.2 | length 12.7
  Top Layer w0.254: U2.5 105.461,83.777 106.432,84.747 Y2.2 ; v1@110.989,84.806 C7.2
  Bottom Layer w0.254: Y2.2 v1@110.755,84.747
  other v1: 110.937,84.928
R1: P4.3 U2.15 U4.2 | length 133.9
  Top Layer w0.254: 93.898,96.517 93.898,76.333 94.55,75.682 U2.15 ; 93.906,96.517 93.906,97.536 95.969,99.599 122.129,99.599 125.871,95.857 125.871,71.593 126.498,70.966 U4.2 ; v1(136.716,70.913) 136.716,72.548 135.896,73.368 135.896,86.029 137.936,88.069 137.936,93.116 138.045,93.226 P4.3
  Bottom Layer w0.254: v1(129.082,70.969) 129.093,70.958 v1@136.881,70.958
R2: U2.12 U4.4 | length 88.7
  Top Layer w0.254: U2.12 96.152,78.432 95.582,79.001 95.582,96.587 96.917,97.922 119.999,97.922 123.335,94.587 123.335,69.24 124.148,68.426 U4.4
RF_CE: U2.22 U6.3 | length 54.6
  Top Layer w0.254: v1@97.101,71.526 97.757,72.182 U2.22 ; v1(130.319,54.223) 130.372,54.17 131.9,54.17 132.357,53.713 U6.3
  Bottom Layer w0.254: v1(97.212,71.231) 97.212,58.026 99.984,55.254 129.288,55.254 v1(130.319,54.223)
RF_CSN: U2.21 U6.4 | length 58.1
  Top Layer w0.254: v1@96.032,71.12 96.032,71.821 96.892,72.682 U2.21 ; v1@131.319,53.129 131.699,53.129 132.386,52.443 U6.4
  Bottom Layer w0.254: v1(95.792,71.286) 95.792,58.655 101.487,52.961 113.702,52.961 113.736,52.995 v1@131.306,52.995
  other v1: 131.306,53.142
RF_IRQ: U2.31 U6.8 | length 51.5
  Top Layer w0.254: U2.31 104.961,70.212 105.233,70.484 112.031,70.484 112.209,70.306 112.209,67.151 115.86,63.499 122.074,63.499 122.994,62.579 122.994,50.822 122.421,50.249 122.421,47.664 123.838,46.246 132.763,46.246 132.763,46.734 U6.8
RF_MISO: U2.27 U6.7 | length 64.2
  Top Layer w0.254: v1(98.807,67.101) 99.422,67.715 102.562,67.715 102.961,68.115 U2.27 ; v1(131.306,49.297) 131.971,48.633 U6.7
  Bottom Layer w0.254: v1(98.807,67.101) 98.807,58.012 100.447,56.372 134.254,56.372 134.994,55.631 134.994,49.629 134.662,49.297 v1@131.472,49.297
RF_MOSI: U2.28 U6.6 | length 54.5
  Top Layer w0.254: v1@102.578,66.538 103.461,67.421 U2.28 ; U6.6 135.498,49.903 v1(136.248,50.652)
  Bottom Layer w0.254: v1(102.735,66.713) 102.735,58.653 104.457,56.931 135.644,56.931 136.23,56.345 v1@136.23,50.782
RF_SCK: U2.26 U6.5 | length 62
  Top Layer w0.254: v1(98.724,68.483) 98.808,68.4 102.267,68.4 102.402,68.535 ; 102.461,68.535 U2.26 ; v1@131.351,51.859 132.037,51.173 U6.5
  Bottom Layer w0.254: v1(98.724,68.483) 98.177,68.483 97.771,68.078 97.771,58.257 100.215,55.813 133.669,55.813 134.349,55.133 134.349,52.257 133.869,51.777 v1(131.269,51.777)
RIGHT: APJ1.3 APJ1.11 APJ2.3 APJ2.11 R14.1 | length 29.5
  Top Layer w0.254: APJ2.11 61.419,77.167 56.369,77.167 APJ1.3 APJ1.11 63.651,64.497 64.208,65.054 R14.1
ROSC1: C11.2 U2.3 Y1.1 | length 25.7
  Top Layer w0.254: Y1.1 101.599,89.432 ; C11.2 101.951,89.08 101.599,89.432 ; U2.3 106.461,81.544 107.225,82.307 108.797,82.307 109.722,83.232 109.722,86.106 108.42,87.408 102.523,87.408 101.599,88.331 101.599,89.432
ROSC2: C12.2 U2.4 Y1.2 | length 33.8
  Top Layer w0.254: C12.2 101.912,95.257 101.599,94.944 Y1.2 99.362,93.425 99.019,93.082 99.019,88.361 100.531,86.849 108.189,86.849 109.163,85.875 109.163,83.463 108.566,82.866 106.8,82.866 105.961,82.027 U2.4
SWCLK: P6.3 U2.37 | length 34
  Top Layer w0.254: U2.37 112.352,71.182 112.767,70.766 112.767,67.382 116.092,64.058 122.305,64.058 123.552,62.81 P6.3
SWDIO: P6.4 U2.34 | length 34.8
  Top Layer w0.254: U2.34 106.461,66.37 107.446,65.386 113.183,65.386 115.629,62.94 121.478,62.94 122.435,61.983 122.435,51.054 121.012,49.631 P6.4
USBDM: R9.1 U2.32 | length 51
  Top Layer w0.254: R9.1 75.17,56.515 77.255,58.6 77.255,63.47 78.907,65.122 104.914,65.122 105.461,65.669 U2.32
USBDP: R10.1 U2.33 | length 60.2
  Top Layer w0.254: R10.1 75.083,47.498 77.814,50.228 77.814,63.238 79.139,64.563 105.166,64.563 105.961,65.358 U2.33
USBPW: R4.1 U2.30 | length 53.8
  Top Layer w0.254: R4.1 64.086,54.737 63.929,54.894 63.929,57.18 64.345,57.597 75.462,57.597 76.696,58.832 76.696,63.701 78.676,65.681 104.182,65.681 104.461,65.96 U2.30
pads on no net: BT1.HOLE C1.0 C2.0 C3.0 C4.0 C5.0 C6.0 C7.0 C8.0 C9.0 C10.0 C11.0 C12.0 C13.0 C14.0 C15.0 P5.10 P5.11 R1.0 R2.0 R3.0 R4.0 R6.0 R7.0 R8.0 R9.0 R10.0 R12.0 R13.0 R14.0 R15.0 R16.0 R17.0 R18.0 U2.20 U2.38 U2.39 U2.40 U2.41 U3.0 U5.3 U5.5 U5.9 U5.11 U5.15 U5.17
copper on no net:
  other v2: 55.535,102.489 60.535,102.489 65.535,102.489 70.535,102.489 75.535,102.489 80.535,102.489 85.535,102.489 90.535,102.489 95.535,102.489 100.535,102.489 105.535,102.489 110.535,102.489 115.535,102.489 120.535,102.489 125.535,102.489 130.535,102.489 135.535,102.489 140.535,102.489 145.535,102.489
  other v3: 55.535,44.089 60.535,44.089 65.535,44.089 70.535,44.089 75.535,44.089 80.535,44.089 85.535,44.089 90.535,44.089 95.535,44.089 100.535,44.089 105.535,44.089 110.535,44.089 115.535,44.089 120.535,44.089 125.535,44.089 130.535,44.089 135.535,44.089

## Polygon pours and split planes (outlines as drawn)
5V on Bottom Layer "B_GND" (solid, remove dead copper, pour order 4): 51.035,101.807 150.046,101.807 150.163,101.69 150.163,97.287 145.076,97.287 145.038,97.249 141.306,93.516 138.944,93.516 51.119,93.516 50.965,93.67
GND on Top Layer "Top Layer-No Net" (solid, remove dead copper, pour order 3): 51.035,43.307 150.135,43.307 150.135,103.307 51.035,103.307

## Keep-outs
Keep-Out Layer:
  lines w0.2: 51.035,44.807 140.022,44.807 ; 51.035,101.807 150.135,101.807 ; 139.957,43.307 51.035,43.307 51.035,103.307 150.135,103.307 150.135,58.086
  lines w0.254: 139.957,43.307 139.957,57.128 140.916,58.086 150.122,58.086

## Silkscreen, mask and mechanical layers (free items; w line width, h text height)
Top Solder:
  rectangle: 51.035,101.807 150.135,103.307
  rectangle: 51.035,43.307 140.046,44.807
Bottom Solder:
  rectangle: 51.035,101.807 150.235,103.307
  rectangle: 51.035,43.307 139.925,44.807

## Text inside footprints (layer, text, board x,y; h text height)
R11: Top Overlay "CW" at 86.165,68.774 h0.76 r90